# Altium PCB Power.PcbDoc
Units mil, origin at the board's own origin, x right, y up, seen from the top; angles counter-clockwise.
Board outline 6000 x 4000 mil, 2 copper layers (Top Layer, Bottom Layer); 67 components, 41 nets, 211 pads, 48 vias.
Unrouted connection lines stored in the file: 6.
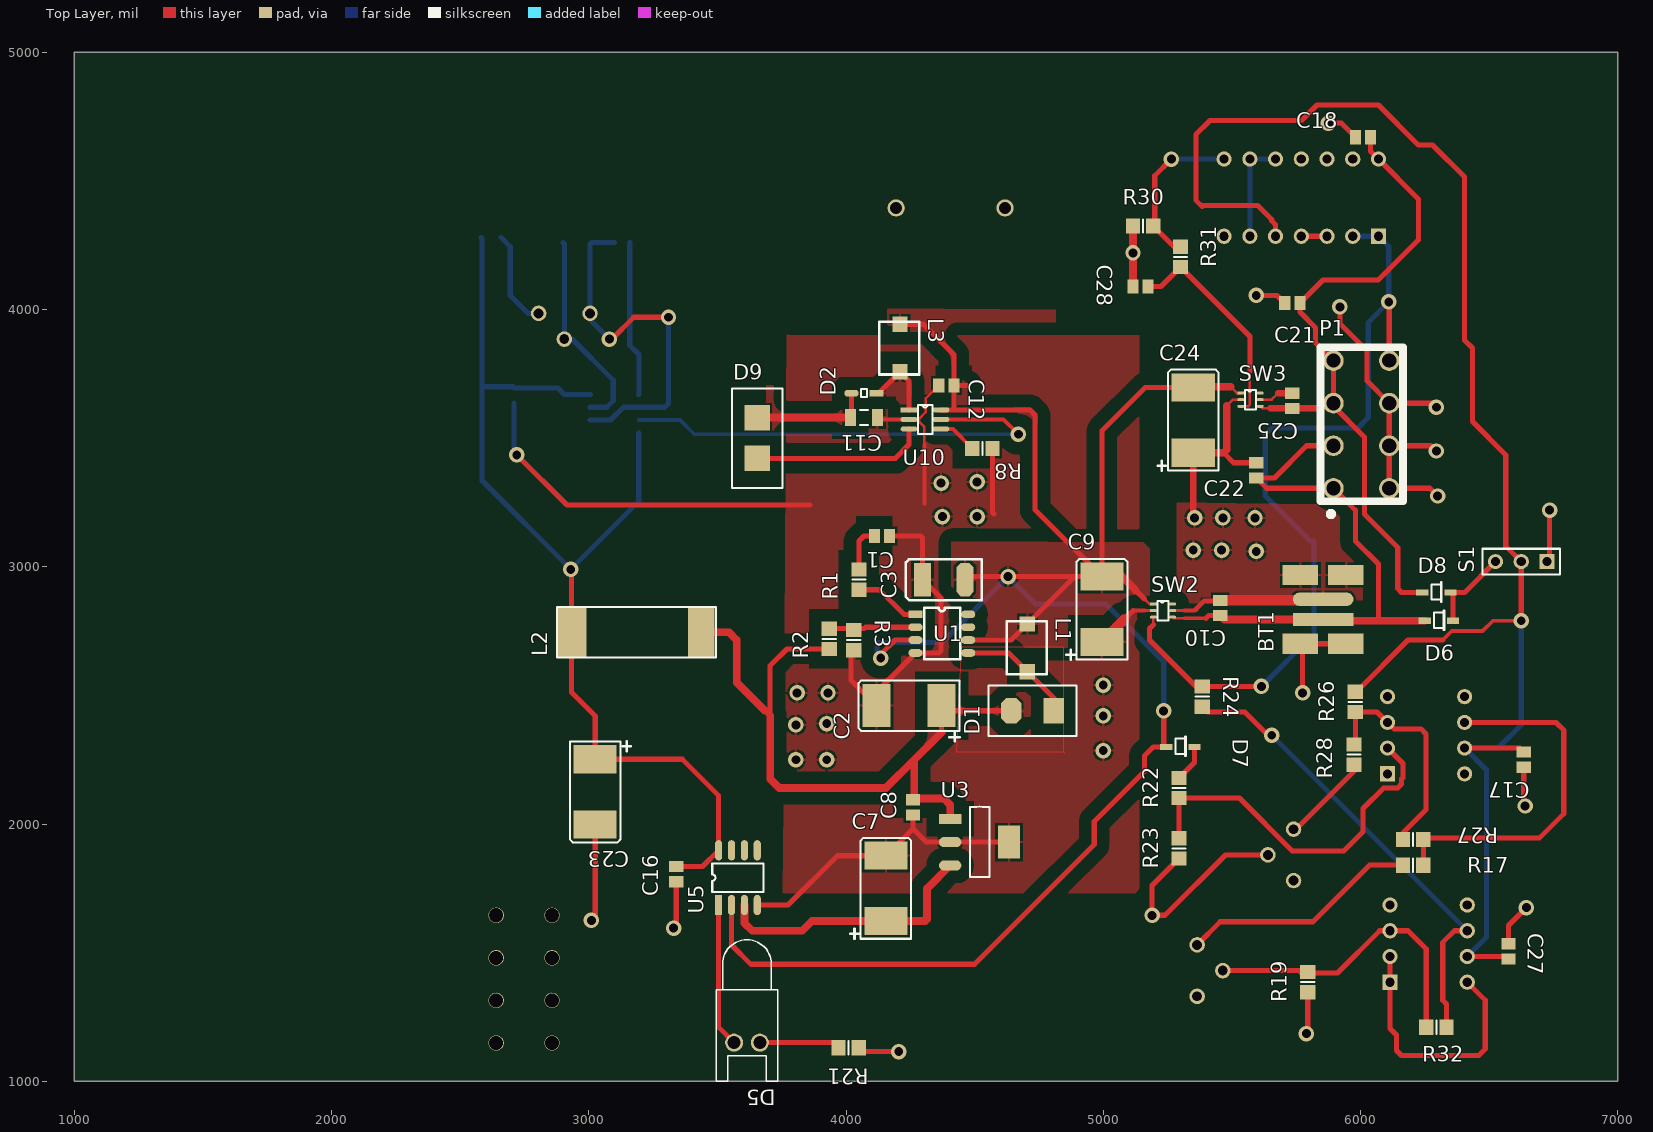
[diagram p0: Top Layer view]
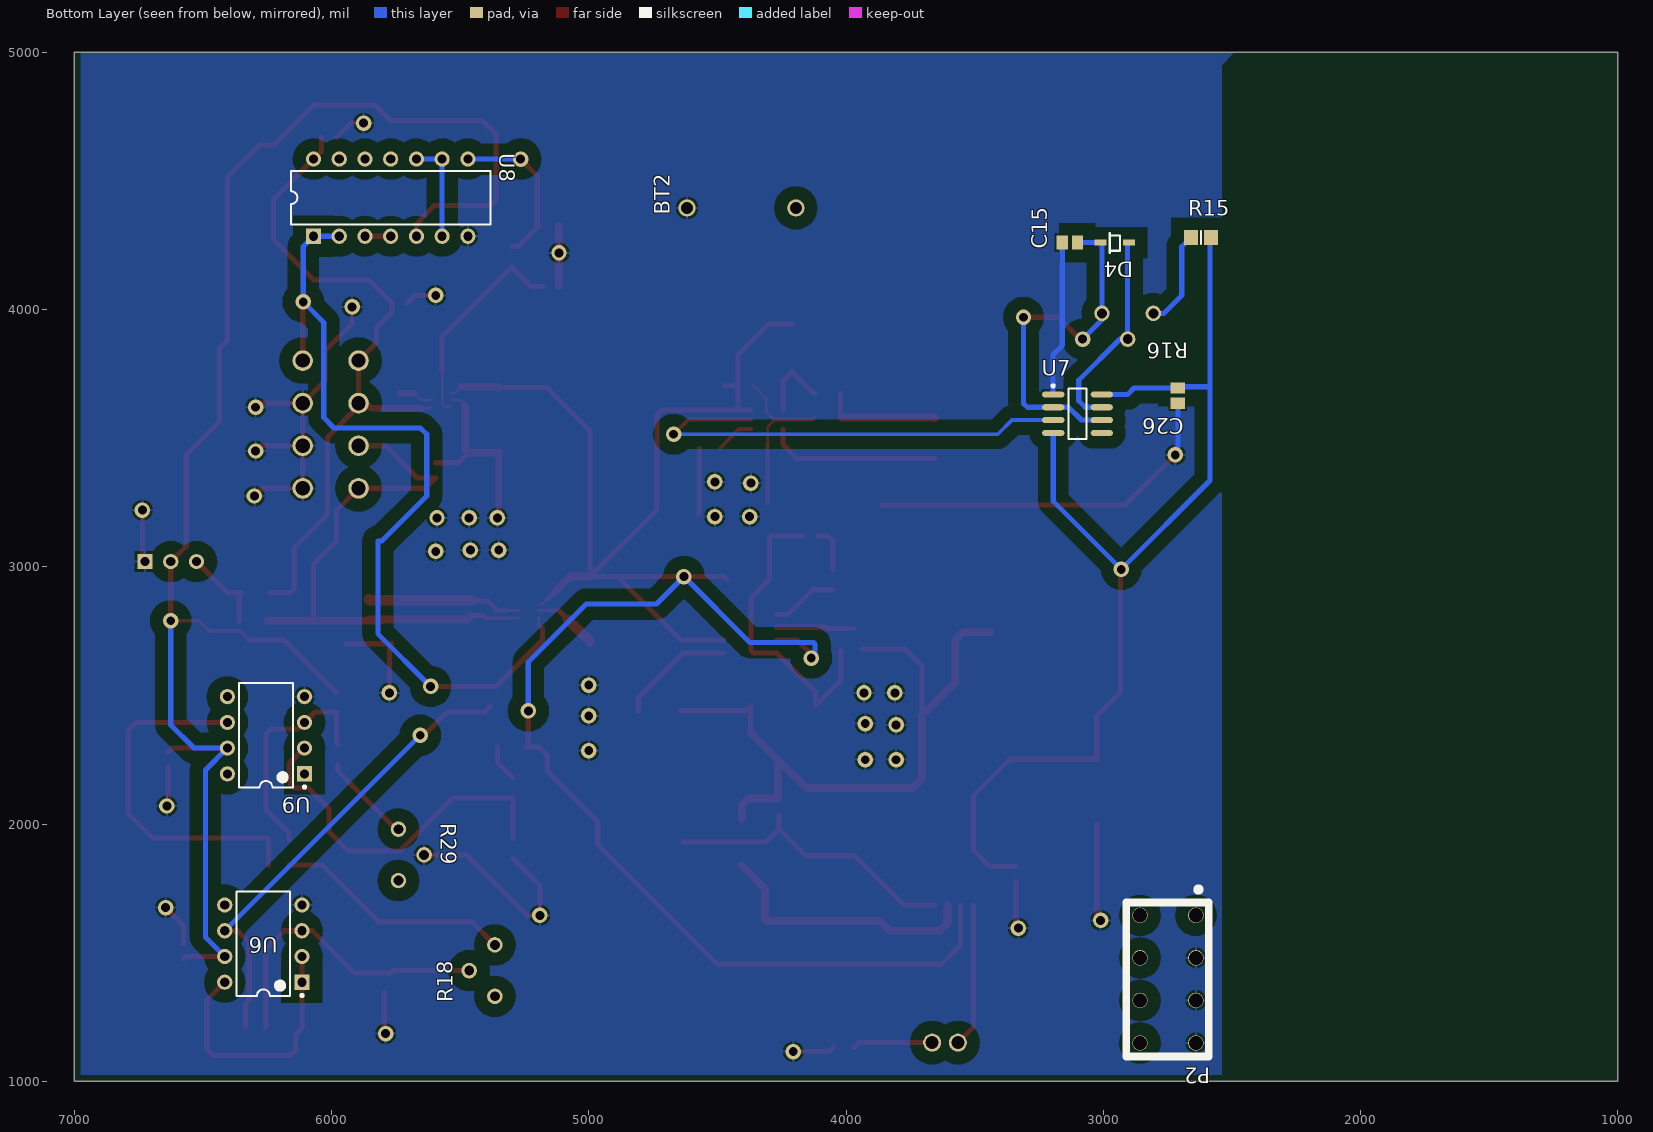
[diagram p1: Bottom Layer view, seen from below]

## Layer stack, top to bottom
Top Layer: signal copper 1.4
Dielectric: dielectric 12.6, FR-4, Dk 4.8
Bottom Layer: signal copper 1.4

## Board outline
1000,1000 7000,1000 7000,5000 1000,5000

## Design rules (kind name [scope] priority, off if disabled: settings)
Clearance Poly [InPoly] p1: gap=50
Clearance "Room Clearance" [TouchesRoom('Room','Room1','Room2')] p2: gap=10
Clearance [All] p3: gap=15
PolygonConnect [All] p1: connectstyle=Relief reliefconductorwidth=10 reliefentries=4 polygonreliefangle="90 Angle" airgapwidth=10
RoomDefinition Room2 [InComponentClass('Room Definition 3')] p1: confinementstyle=ConfineIn formatcopy=TRUE lockcomponents=FALSE outline 5507.22,3597.09 5507.22,3701.73 5637.58,3701.73 5637.58,3597.09
RoomDefinition Room [InComponentClass('Room Definition 1')] p2: confinementstyle=ConfineIn formatcopy=TRUE lockcomponents=FALSE outline 5167.22,2777.09 5167.22,2881.73 5297.58,2881.73 5297.58,2777.09
RoutingVias [All] p1: holewidth=28 width=50 viastyle="Through Hole" minholewidth=28 minwidth=50 maxholewidth=28 maxwidth=50
SilkscreenOverComponentPads [All] p1: minsilkscreentomaskgap=10
SolderMaskExpansion [All] p1: expansion=4
Width RoomWIdth [TouchesRoom('Room','Room1','Room2')] p1: maxlimit=10 minlimit=10 preferedwidth=10
Width [All] p2: maxlimit=40 minlimit=10 preferedwidth=20
27 further rules are at their usual default settings.

## Classes and differential pairs
component class Control_Sig: C15 C16 C17 C18 C26 C27 C28 D4 D5 D7 R15 R16 R17 R18 R19 R21 R22 R23 R26 R27 R28 R29 R30 R31 R32 U5 U6 U7 U8 U9
component class Power: BT1 BT2 C1 C2 C3 C7 C8 C9 C10 C11 C12 C21 C22 C23 C24 C25 D1 D2 D6 D8 D9 L1 L2 L3 P1 P2 R1 R2 R3 R8 R24 S1 SW2 SW3 U1 U3 U10

## Components (designator, comment, footprint, x,y, rotation, side; value= is the part's Value field where it differs from the comment)
BT1 "3.7V Li-Ion" "BATERY CONNECTOR" 5855,2795 r90 top
BT2 "Battery" "10MM COIN CELL" 4195,4395 r0 bottom
C1 "Cap" C0805 4140,3120 r180 top
C2 "220u" C2917 4245,2460 r180 top
C3 "47u" C2312 4380,2950 r180 top
C7 "220u" C2917 4155,1750 r90 top
C8 ".47u" C0805 4260,2065 r90 top
C9 "500u" C2917 4995,2835 r90 top
C10 "4.7uF" C0805 5455,2840 r270 top
C11 "1u" C1206 4070,3580 r180 top
C12 "4.7u" C0805 4390,3705 r0 top
C15 "22nF" C0805 3130,4260 r0 bottom
C16 "100nF" C0805 3340,1805 r270 top
C17 "100nF" C0805 6635,2250 r270 top
C18 "100nF" C0805 6010,4670 r0 top
C21 "100nf" C0805 5735,4025 r0 top
C22 "100nf" C0805 5595,3375 r270 top
C23 "1mF" C2917 3025,2125 r270 top
C24 "Cap" C2917 5350,3570 r90 top
C25 "4.7u" C0805 5735,3645 r270 top
C26 "100nF" C0805 2710,3665 r270 bottom
C27 "Cap" C0805 6575,1505 r270 top
C28 "4nF" C0805 5145,4090 r0 top
D1 "D Schottky" ShottkeyDiode 4725,2440 r180 top
D2 "D Schottky" ZHCSDiode 4070,3675 r180 top
D4 "Diode 1N4148" Diode 2955,4260 r0 bottom
D5 "LED0" LED-0 3615,1150 r180 top
D6 "Diode 1N4148" Diode 6305,2790 r0 top
D7 "Diode 1N4148" Diode 5300,2300 r0 top
D8 "Diode 1N4148" Diode 6295,2900 r0 top
D9 "D Zener" Zener 3655,3500 r90 top
L1 "4.7u" Inductor 4705,2685 r270 top
L2 "Inductor" "470U inductor" 3185,2745 r180 top
L3 "4.7u" Inductor 4210,3850 r270 top
P1 "Header 4X2" "Molex MiniFit Jr8"#1 5895,3305 r90 top
P2 "Header 4X2" "Molex MiniFit Jr8"#2 2640,1645 r270 bottom
R1 "47k" 6-0805_M 4050,2950 r90 top
R2 "309k" 6-0805_M 3935,2720 r90 top
R3 "100K" 6-0805_M 4030,2715 r270 top
R8 "1.27k" 6-0805_M 4530,3460 r180 top
R15 "Res1" 6-0805_M 2620,4280 r0 bottom
R16 "100K" POT 2805,3985 r0 bottom
R17 "Res1" 6-0805_M 6205,1840 r0 top
R18 "RPot" POT 5365,1330 r90 bottom
R19 "Res1" 6-0805_M 5795,1385 r90 top
R21 "Res1" 6-0805_M 4010,1130 r180 top
R22 "500K" 6-0805_M 5295,2140 r90 top
R23 "500K" 6-0805_M 5295,1905 r90 top
R24 "Res1" 6-0805_M 5385,2495 r270 top
R26 "500k" 6-0805_M 5980,2475 r90 top
R27 "Res1" 6-0805_M 6205,1940 r180 top
R28 "450k" 6-0805_M 5975,2270 r90 top
R29 "RPot" POT 5740,1980 r270 bottom
R30 "Res1" 6-0805_M 5155,4325 r0 top
R31 "Res1" 6-0805_M 5300,4205 r90 top
R32 "5M" 6-0805_M 6295,1210 r0 top
S1 "SW-SPDT" HDR1X3 6725,3020 r180 top
SW2 "SIP32431" "SOT6 - duplicate" 5195,2855 r0 top
SW3 "SIP32431" "SOT6 - duplicate" 5535,3675 r0 top
U1 "LTC1308ACS8" SOP8_LTC1308A 4270,2815 r0 top
U3 "LM3940" LDO 4405,2020 r0 top
U5 "MCP6022 OpAmp" SOP8_Opamp 3505,1685 r90 top
U6 "LT1635CN8" N8 6265,1535 r0 bottom
U7 "NE555D" D008_N 3100,3595 r180 bottom
U8 "SN74HC00N" N014 5770,4435 r180 bottom
U9 "LT1635CN8" N8 6255,2345 r0 bottom
U10 "LT1932" SOT6 4245,3610 r0 top

## Footprints (in the part's own frame and the unit in brackets; to place one, negate y for a bottom-side part, rotate by r counter-clockwise, add the part's x,y. Pads: shape width x height; smd on the part's side, far side on the other; paste and mask are expansions set on the pad)
6-0805_M [mm] "Chip Resistor, Body 2.0x1.2mm, IPC Low Density"
  rect 1.4x1.5 smd: 1(-1,0) 2(1,0)
  silkscreen extent 0,-0.65 0,0.65, body extent -1.07,-0.7 1.07,0.7, height 0.7
"10MM COIN CELL" [mm]
  rect 18.77x12.83 on Bottom Overlay: 0(5.37,0)
  round 1.7 hole 1.2: 1(0,0) 2(10.74,0)
"470U inductor" [mm]
  rect 2.6x5 smd: 1(-6.4,0)
  rect 3x5 smd: 2(6.4,0)
  silkscreen extent -7.85,-2.5 7.85,2.5
"BATERY CONNECTOR" [mm]
  rect 2x3.5 smd: 0(-2.4,-2.25) 0(-2.4,2.25) 0(4.4,-2.25) 0(4.4,2.25)
  rect 1.3x6 smd: 1(0,0)
  oval 1.3x6 smd: 2(2,0)
C0805 [mm] "Chip Capacitor, Body 2.0x1.3mm, IPC High Density"
  rect 1.1x1.4 smd: 1(-0.75,0) 2(0.75,0)
  body extent -1.1,-0.72 1.1,0.72, height 1.4
C1206 [mm] "Chip Capacitor, Body 3.2x1.6mm, IPC High Density"
  rect 1.1x1.7 smd: 1(-1.35,0) 2(1.35,0)
  silkscreen extent -0.4,-0.75 0.4,0.75, body extent -1.7,-0.9 1.7,0.9, height 1.3
C2312 [mil]
  oct 66.93x130 smd: 1(-82.5,0)
  rect 66.93x130 smd: 2(82.5,0)
  silkscreen extent -148,-79 148,80
C2917 [mm]
  rect 2.77x4.25 smd: 1(-3.22,0) 2(3.22,0)
  silkscreen extent -5,-2.5 4.98,3.5
D008_N [mm] "SOIC, 8-Leads, Body 4.9x3.9mm, Pitch 1.27mm, IPC Medium Density"
  oval 2.2x0.6 smd: 1(-2.4,1.905) 2(-2.4,0.635) 3(-2.4,-0.635) 4(-2.4,-1.905) 5(2.4,-1.905) 6(2.4,-0.635) 7(2.4,0.635) 8(2.4,1.905)
  silkscreen extent -2.53,-2.5 0.9,2.88, body extent -1.95,-2.45 1.95,2.45, height 1.75
Diode [mm]
  rect 1.2x0.6 smd: A(-1.4,0) K(1.4,0)
  silkscreen extent -0.5,-0.9 0.5,1
HDR1X3 [mm] "Connector; Header; 3 Position"
  rect 1.5x1.5 hole 0.9: 1(0,0)
  round 1.5 hole 0.9: 2(2.54,0) 3(5.08,0)
  silkscreen extent -1.27,-1.27 6.35,1.27
Inductor [mil]
  rect 60x60 smd: 1(-92.5,0) 2(92.5,0)
  silkscreen extent -103,-80 103,75
LDO [mm]
  rect 2.2x1 smd: 1(0,0)
  oval 2.2x1 smd: 2(0,-2.3) 3(0,-4.6)
  rect 2.2x3.25 smd: 4(5.8,-2.3)
  silkscreen extent 1.94,-5.75 3.87,1.2
LED-0 [mil] "LED; 2 Leads"
  round 70 hole 50: 1(50,0) 2(-50,0)
  silkscreen extent -120,-400 120,150
"Molex MiniFit Jr8"#1 [mil] "10 pin minifit jr (power cable)"
  round 80 hole 55 mask+4: 1(0,0) 2(0,-217) 3(165.5,0) 4(165.5,-217) 5(330.9,0) 6(330.9,-217) 7(496.3,0) 8(496.3,-217)
  silkscreen extent -110,-270 548,50
"Molex MiniFit Jr8"#2 [mil] "10 pin minifit jr (power cable)"
  round 60 hole 55: 1(0,0) 2(0,-217) 3(165.5,0) 4(165.5,-217) 5(330.9,0) 6(330.9,-217) 7(496.3,0) 8(496.3,-217)
  silkscreen extent -110,-270 548,50
N8 [mm] "DIP, 8-Leads, Row Spacing 7.62mm, Pitch 2.54mm, Body 9.78x6.48mm"
  rect 1.5x1.5 hole 0.9: 1(-3.81,3.81)
  round 1.5 hole 0.9: 2(-3.81,1.27) 3(-3.81,-1.27) 4(-3.81,-3.81) 5(3.81,-3.81) 6(3.81,-1.27) 7(3.81,1.27) 8(3.81,3.81)
  silkscreen extent -3.93,-5.15 2.65,5.23, body extent -3.6,-5.15 3.6,5.15, height 4.45
N014 [mm] "DIP; 14 Leads; Row Spacing 7.62 mm; Pitch 2.54 mm"
  rect 1.5x1.5 hole 0.9: 1(-7.62,-3.81)
  round 1.5 hole 0.9: 2(-5.08,-3.81) 3(-2.54,-3.81) 4(0,-3.81) 5(2.54,-3.81) 6(5.08,-3.81) 7(7.62,-3.81) 8(7.62,3.81) 9(5.08,3.81) 10(2.54,3.81) 11(0,3.81) 12(-2.54,3.81) 13(-5.08,3.81) 14(-7.62,3.81)
  silkscreen extent -9.85,-2.65 9.85,2.65
POT [mil]
  round 60 hole 38: 1(0,0) 2(100,100) 3(200,0)
ShottkeyDiode [mm]
  rect 2x2.5 smd: A(-2.1,0)
  oct 2x2.5 smd: K(2.1,0)
  silkscreen extent -4.35,-2.5 4.35,2.5
SOP8_LTC1308A [mil]
  rect 55x30 smd: 1(0,0)
  oval 55x30 smd: 2(0,-50) 3(0,-100) 4(0,-150) 5(205,-150) 6(205,-100) 7(205,-50) 8(205,0)
  silkscreen extent 34,-175 174,25
SOP8_Opamp [mm]
  rect 2x0.7 smd: 1(0,0)
  oval 2x0.7 smd: 2(0,-1.27) 3(0,-2.54) 4(0,-3.81) 5(5.4,-3.81) 6(5.4,-2.54) 7(5.4,-1.27) 8(5.4,0)
  silkscreen extent 1.3,-4.44 4.1,0.64
SOT6 [mm]
  rect 1.65x0.5 smd: 1(0,0)
  oval 1.65x0.5 smd: 2(0,-0.95) 3(0,-1.9) 4(3.15,-1.9) 5(3.15,-0.95) 6(3.15,0)
  silkscreen extent 0.9,-2.38 2.3,0.48
"SOT6 - duplicate" [mm]
  rect 0.7x0.3 smd: 1(0,0)
  oval 0.7x0.3 smd: 2(0,-0.65) 3(0,-1.3) 4(1.9,-1.3) 5(1.9,-0.65) 6(1.9,0)
  silkscreen extent 0.4,-1.62 1.5,0.33
Zener [mm]
  rect 2.5x2.5 smd: 1(-2,0) 2(2,0)
  silkscreen extent -4.9,-2.5 4.9,2.5
ZHCSDiode [mm]
  rect 1.4x0.65 smd: A(-1.225,0)
  oct 1.4x0.65 smd: K(1.225,0)
  silkscreen extent -0.3,-0.4 0.3,0.4

## Part data
BT1: library part Battery, "Multicell Battery"
BT2: "Multicell Battery"
C1 C24 C27: "Capacitor"
C2 C3: library part "Cap Pol1", "Polarized Capacitor (Radial)"
C7 C8 C9 C10 C11 C12 C15 C16 C17 C18 C21 C22 C23 C25 C26 C28: library part Cap, "Capacitor"
D1 D2: "Schottky Diode"
D4 D6 D7 D8: "High Conductance Fast Diode"
D5: "Typical INFRARED GaAs LED"
D9: "Zener Diode"
L1 L3: library part Inductor, "Inductor"
P1 P2: "Header, 4-Pin, Dual row"
R1 R2 R3 R8 R22 R23 R26 R28 R32: library part Res1, "Resistor"
R15: "=value"
R16: library part RPot, "Potentiometer"
R17 R19 R21 R24 R27 R30 R31: "Resistor"
R18 R29: "Potentiometer"
S1: "SPDT Subminiature Toggle Switch, Right Angle Mounting, Vertical Actuation"
U6 U9: "Micropower Rail-to-Rail Operational Amplifier and Reference"
U7: "Precision Timer"
U8: "Quadruple 2-Input Positive-NAND Gate"

## Via types
v1: diameter 60, hole 34.53, Top Layer to Bottom Layer, 48 vias

## Nets (pads, with @x,y where several pads share a name; then routed paths per layer and width w, separated by ;. In a path a pad name is that pad's centre, name@x,y a point inside that pad or via, vN(x,y) a via of type N, cw(c..) or ccw(c..) an arc to the next point about the centre after c; other vN are vias at no path point)
5V5: C16.1 C23.1 C26.1 L2.2 P2.4 R15.1 U5.8 U7.4 U7.8 | length 4227
  Top Layer w20: v1(2930,2990) 2933.03,2986.97 L2.2 2933.03,2511.97 3025,2420 C23.1 3363.23,2251.77 3505,2110 U5.8 3441.93,1834.53 C16.1
  Bottom Layer w20: R15.1 2585,4275.63 2585,3700 ; U7.8 2905,3670 2880.47,3694.53 C26.1 2704.53,3700 2585,3700 ; U7.4 3194.49,3254.49 v1(2930,2990) 2585,3335 2585,3700
"CHARGE CONNECT": P1.8 R24.1 SW2.3 U8.1 U8.2 | length 3267.8
  Top Layer w10: 5195,2775 SW2.3
  Top Layer w20: 5195,2775 5180,2760 5180,2715 5360.63,2534.37 R24.1 5385.63,2535 v1(5615,2535) ; P1.8 v1@6112,4030
  Bottom Layer w20: v1(5615,2535) 5820,2740 5820,3100 5805,3100 5630,3275 5630,3515 5655,3540 5990,3540 6030,3580 6030,3950 v1(6110,4030) 6110,4245 U8.1 U8.2
GND: BT1.0 BT1.2 BT2.2 C1.1 C2.2 C3.2 C7.2 C8.1 C9.1 C10.1 C11.1 C12.1 C15.2 C16.2 C17.2 C18.1 C21.1 C22.1 C23.2 C24.1 C25.1 C26.2 C27.1 C28.1 P1.2 P1.4 P1.6 P2.3 P2.5 P2.7 R3.2 R8.1 R19.1 R21.1 R23.1 R29.2 R30.1 S1.1 SW2.2 SW2.5 SW3.2 SW3.5 U1.4 U3.2 U3.4 U5.4 U6.4 U7.1 U8.7 U9.4 U10.2 | length 11557.4
  Top Layer w10: U10.2@4275.98,3572.6 4305,3543.57 4305,3475 ; 4281.74,3572.6 4310,3600.86 4310,3654.53 C12.1 ; C28.1 C28.1@5115.63,4090.16 ; 5160,2830 5194.41,2830 SW2.2 ; SW2.5 5270.39,2830 5315,2830 ; 5480,3625 5504.41,3649.41 SW3.2 ; SW3.5 5610.39,3650 5655,3650 5679.53,3674.53
  Top Layer w15: C11.1 4130.55,3572.6 U10.2 4275.98,3572.6 4281.74,3572.6 ; 4305,3245 4305,3475 ; 5116.77,2830 5160,2830 ; 5315,2830 5355,2830
  Top Layer w20: v1(2720,3435) 2915,3240 3860,3240 ; v1(3010,1625) 3025,1640 C23.2 ; v1(3330,1595) 3340,1605 C16.2 ; U5.4 3775,1685 3966.77,1876.77 C7.2 4260,1981.77 ; R3.2@4020,2675 4020,2558.23 C2.2 4118.23,2513.23 U1.4 4360,2665 4370,2675 4370,2877.5 C3.2 4297.5,3112.5 4290,3120 C1.1 ; R21.1 4064.37,1115 v1(4205,1115) ; C8.1 4260,1981.77 ; R8.1 4569.37,3210.63 4575,3205 ; U3.4 U3.2 4404.45,1930 4311.77,1930 4260,1981.77 ; 5081.77,2795 5116.77,2830 ; R23.1 5190,1760.63 v1(5190,1645) 5240,1645 5475,1880 R29.2 ; 5360,2835 5392.5,2867.5 5452.97,2867.5 C10.1 ; 5468.23,3443.23 5506.93,3404.53 C22.1 ; v1(5595,4055) 5675.47,4055 C21.1 ; v1(5775,2510) 5775,2691.93 5766.42,2700.51 BT1.0@5943.58,2700.51 ; v1(5790,1185) 5795,1190 R19.1 ; v1(5875,4725) 5925.47,4725 C18.1 ; v1(5920,4010) 5920,3945 6025,3840 6025,3722.9 P1.6 ; v1(6295,3450) 6274.5,3470.5 P1.4 ; v1(6295,3620) 6279.1,3635.9 P1.6 ; v1(6300,3275) 6270,3305 P1.2 P1.4 ; C27.1 6575,1605 v1(6645,1675) ; C17.2 6635,2075 v1(6640,2070) ; S1.1 6735,3030 v1(6735,3220) ; P1.4 P1.6
  Top Layer w25: C24.1 5350,3195 v1(5355,3190) ; 5679.53,3674.53 C25.1
  Top Layer w30: C28.1@5115.63,4090.16 R30.1 ; C24.1 5468.23,3443.23 5480,3455 5480,3625
  Top Layer w40: C9.1 5081.77,2795 ; C10.1 5850.79,2869.53 BT1.2
  Bottom Layer w20: C26.2 2710,3445 v1(2720,3435) ; C15.2 3159.53,3860.47 3195,3825 3195,3670.51 U7.1
  other v1: 3805,2250 3925,2250 5000,2285 3805,2385 3925,2390 5000,2420 3810,2510 3930,2510 5000,2540 5595,3060 5350,3065 5460,3065 5465,3190 5590,3190 4375,3195 4510,3195 4370,3325 4510,3330 5115.63,4220
LBI: U1.7
LBO: U1.8
LDO3: C7.1 P2.8 U3.3 U5.3 | length 1057.2
  Top Layer w20: 4308.23,1623.23 4315,1630
  Top Layer w30: U5.3 3605,1615 3635,1585 3830,1585 3868.23,1623.23 C7.1 4308.23,1623.23 ; 4315,1630 4315,1748.9 U3.3
LEDA: C11.2 D2.K D9.2 P2.2 | length 459.4
  Top Layer w20: C11.2 4021.77,3584.92 D2.K
  Top Layer w30: D9.2 3656.26,3580 C11.2
LEDK: D9.1 P2.1 U10.3 | length 672.5
  Top Layer w20: D9.1 4191.26,3421.26 4245,3475 U10.3
NetBT2_1: BT2.1 P2.6
NetC1_2: C1.2 R1.2 | length 179.4
  Top Layer w20: R1.2 4050,3100 4070,3120 C1.2
NetC2_1: C2.1 C8.2 D1.K L2.1 R2.1 U3.1 | length 2724.7
  Top Layer w20: R2.1 3770.63,2680.63 3705,2615 3705,2440 ; 4371.77,2356.77 C2.1 4391.77,2440 D1.K ; 3705,2440 3705,2420 3685,2440 3705,2440
  Top Layer w30: L2.1 3545,2745 3575,2715 3575,2550 3685,2440 ; 3705,2420 3705,2175 3740,2140 4155,2140 4265,2250 ; 4371.77,2356.77 4265,2250 ; U3.1 4405,2074.06 4379.53,2099.53 4265,2099.53 4265,2250
NetC15_1: C15.1 D4.K R16.3 U7.2 U7.6 | length 1430.2
  Top Layer w20: v1(3080,3885) 3090,3885 3175,3970 v1(3310,3970)
  Bottom Layer w20: U7.6 3085,3570 3135,3620 U7.2 3295,3620 3310,3635 v1(3310,3970) ; v1(3080,3885) 3005,3960 R16.3 3005,4254.88 D4.K C15.1
NetD2_1: D2.A L3.2 U10.1 | length 287.9
  Top Layer w20: D2.A 4127.5,3675 L3.2 4245,3722.5 U10.1
NetD4_A: D4.A R16.2 U7.7 | length 813.2
  Bottom Layer w20: D4.A 2905,4254.88 R16.2 2935,3885 3095,3725 3095,3645 3070,3620 U7.7
NetD5_1: D5.1 U5.1 | length 559.9
  Top Layer w20: U5.1 3505,1210 D5.1
NetD5_2: D5.2 R21.2 | length 313.9
  Top Layer w20: D5.2 3950.63,1150 R21.2
NetD6_K: D6.K D8.K S1.3 | length 338.7
  Top Layer w20: D6.K 6360.12,2890 D8.K 6405,2900 S1.3
NetD7_K: D7.K R22.2 | length 145.5
  Top Layer w20: R22.2 5355.12,2239.49 D7.K
NetR1_1: R1.1 U1.1 | length 259.6
  Top Layer w20: R1.1 4129.37,2910.63 4225,2815 U1.1
NetR2_2: R2.2 R3.1 U1.2 | length 302.3
  Top Layer w20: 3970,2759.37 4070,2759.37 4075.63,2765 U1.2
NetR8_2: R8.2 U10.4 | length 152.8
  Top Layer w15: U10.4 4415.43,3535.2 R8.2
NetR15_2: R15.2 R16.1 | length 378.8
  Bottom Layer w20: R15.2 2695,4244.37 2695,4055 2765,3985 R16.1
NetR17_1: R17.1 R18.3 | length 929
  Top Layer w20: R18.3 5455,1620 5815,1620 6035,1840 R17.1
NetR17_2: R17.2 R27.1 U9.6 | length 1409.5
  Top Layer w20: R17.2 R27.1 6249.37,1945 6695,1945 6790,2040 6790,2365 6760,2395 U9.6
NetR18_2: R18.2 R19.2 R32.1 U6.3 | length 1196.2
  Top Layer w20: R18.2 5760.63,1430 5770,1420.63 5910.63,1420.63 6075,1585 U6.3 6185,1585 6255.63,1514.37 R32.1
NetR22_1: R22.1 R23.2 U9.2 | length 1433.4
  Top Layer w20: R23.2 R22.1 5529.37,2100.63 5735,1895 5935,1895 6010,1970 6010,2060 6090.47,2140.47 6144.88,2140.47 6159.53,2155.12 6159.53,2174.53 6165,2180 6165,2235 U9.2
NetR26_1: R26.1 R27.2 R28.2 U9.3 | length 885.8
  Top Layer w20: R28.2 5980,2314.37 R26.1 6064.37,2435.63 U9.3 6130,2370 6235,2370 6255,2350 6255,2055 6165.63,1965.63 R27.2
NetR28_1: R28.1 R29.1 | length 358
  Top Layer w20: R29.1@5740,1970 5975,2205 R28.1
NetR30_2: R30.2 R31.2 U8.8 | length 633.3
  Top Layer w20: v1(5265,4585) 5200,4520 5200,4330.63 R30.2 5275,4244.37 R31.2
  Bottom Layer w20: v1(5265,4585) U8.8
NetU6_1: U6.1 U6.2 U6.8 | length 1028
  Top Layer w20: U6.2 U6.1 6115,1205 6140,1180 6140,1120 6160,1100 6460,1100 6485,1125 6485,1315 U6.8
NetU8_3: U8.3 U8.4 | length 100
  Top Layer w20: U8.4 U8.3
NetU8_6: U8.6 U8.9 U8.10 | length 400
  Bottom Layer w20: U8.6 U8.9 U8.10
ON/OFF: R24.2 R32.2 U6.6 | length 1845.2
  Top Layer w20: R24.2 5405.63,2435 5550,2435 5640,2345 v1(5655,2345) ; R32.2 6334.37,1300.63 6320,1315 6320,1540 6365,1585 U6.6
  Bottom Layer w20: v1@5650,2345 v1(5655,2345) U6.6
PWM: U7.3 U10.5 | length 1823.1
  Top Layer w15: U10.5 4612.4,3572.6 v1(4670,3515)
  Bottom Layer w15: U7.3 3355,3570 3410,3515 v1(4670,3515)
SW: D1.A L1.2 U1.5 | length 455.1
  Top Layer w20: U1.5 4632.5,2665 L1.2 4807.68,2489.82 D1.A
VBAT: BT1.1 C10.2 C22.2 D6.A P1.1 P1.3 SW2.4 | length 2298.2
  Top Layer w10: SW2.4 5273.62,2800 5315,2800
  Top Layer w15: 5315,2800 5400,2800
  Top Layer w20: 5400,2800 5410.47,2810.47 C10.2 ; P1.3 5790.5,3470.5 5665.47,3345.47 C22.2 5635.47,3305 P1.1 5980,3220 5980,3100.5 6070,3010.5 6070,2790
  Top Layer w30: C10.2 5470.47,2795 BT1.1 ; BT1.1@5805.2,2790 6070,2790 D6.A@6249.8,2790
VBATCHECK: C17.1 C27.2 R26.2 S1.2 U6.7 U8.5 U9.7 | length 6379.2
  Top Layer w15: 6320,2715 6355,2750 6475,2750 6515,2790 v1(6625,2790)
  Top Layer w20: U8.5 5670,4330 5655,4345 5655,4350 5600,4405 5390,4405 5385,4400 5360,4425 5360,4680 5415,4735 5770.9,4735 5830.9,4795 6070,4795 6225,4640 6280,4640 6405,4515 6405,3880 6435,3850 6435,3565 6565,3435 6565,3080 S1.2 v1(6625,2790) ; R26.2 5984.37,2514.37 6185,2715 6320,2715 ; U9.7 6619.53,2295 C17.1 ; U6.7 6565.47,1485 C27.2
  Bottom Layer w20: U6.7 6490,1560 6490,2210 U9.7 6535,2295 6625,2385 v1(6625,2790)
VCC: 
VIN: C3.1 C9.2 C12.2 C24.2 D7.A L1.1 L3.1 SW2.1 SW3.1 U1.3 U1.6 U5.2 U10.6 | length 8362.8
  Top Layer w10: 5160,2875 5180,2855 SW2.1 ; 5495,3700 5520,3675 SW3.1
  Top Layer w20: U5.2 3555,1530 3630,1455 4500,1455 4965,1920 4965,2010 5160,2205 5160,2265 5195,2300 D7.A 5235,2309.88 v1(5235,2440) ; v1(4135,2645) 4135,2660 4190,2715 U1.3 ; L3.1 4301.56,3942.5 4419.53,3824.53 C12.2 ; U10.6 4420,3610 ; C3.1 4474.27,2961.77 v1(4630,2961.77) 4889.27,2961.77 ; 4470,3705 C12.2 ; U1.6 4642.5,2715 L1.1 4889.27,2961.77 ; 5125,2910 5160,2875 ; C24.2 5163.23,3696.77 4995,3528.54 C9.2 ; C12.2 4419.53,3610.47 4420,3610 ; 4420,3610 4715,3610 4735,3590 4735,3221.77 C9.2 ; 4889.27,2961.77 C9.2
  Top Layer w30: C9.2 5073.23,2961.77 5125,2910 ; C24.2 5353.23,3700 5495,3700
  Bottom Layer w20: v1(4135,2645) 4120,2660 4120,2700 4125,2705 4373.23,2705 v1(4630,2961.77) 4736.77,2855 5010,2855 5235,2630 v1(5235,2440)
VWALL: C18.2 C21.2 C25.2 D8.A P1.5 P1.7 SW3.4 U8.14 | length 2714.5
  Top Layer w10: SW3.4 5618.15,3615.47 5650,3615.47
  Top Layer w20: C18.2 6039.53,4615.47 U8.14 6225,4430 6225,4270.47 6160,4205.47 6069.53,4115 5855,4115 5854.76,4115.24 C21.2 5764.53,3990.47 5825.41,3929.59 5825.41,3870.89 P1.7 P1.5 5895,3625 6015,3505 6015,3205 6145,3075 6145,2915 6160,2900 D8.A
  Top Layer w25: 5650,3615.47 5845.47,3615.47 5865.9,3635.9 P1.5
  Bottom Layer w20: U8.14 U8.14@6080,4585
WALLON: C28.2 R31.1 SW3.3 | length 841.8
  Top Layer w10: SW3.3 5563.82,3623.82 5570,3630 5570,3760
  Top Layer w20: C28.2 5224.37,4090 R31.1 5570,3895.63 5570,3760
pads on no net: BT2.0 R18.1 R29.3 SW2.6 SW3.6 U5.5 U5.6 U5.7 U6.5 U7.5 U8.11 U8.12 U8.13 U9.1 U9.5 U9.8

## Polygon pours and split planes (outlines as drawn)
GND on Bottom Layer "GRND" (solid, remove dead copper, pour order 10): 2490,5000 2540,4950 2540,1025 6975,1025 6995,1005 6975,1025 6975,5000
GND on Top Layer "Grnd" (solid, pour order 2): 5285,3250 5285,2840 6050,2840 6055,2835 6035,2855 6035,3240
VIN on Top Layer "Vin" (solid, pour order 4): 4410,3100 4410,2690 4415,2685 5180,2685 5180,3070 5155,3095
GND on Top Layer "grnd" (solid, pour order 6): 3770.39,3910 3778.08,3900.84 5140,3900.84 5140,1748.32 5132.31,1739.16 5124.61,1730 3755,1730
NetC2_1 on Top Layer "NetC2" (solid, pour order 8): 4305,2560.82 4305,2289.18 4310,2285 4720,2285 4720,2565
SW on Top Layer "SW" (solid, pour order 10): 4450,2690 4845,2690 4845,2279.72 4850,2275 4845,2279.72 4430,2279.72
VIN on Top Layer "Vin" (solid, pour order 14): 4160,4005 4160,3560 4200,3520 4815,3520 4815,4000
NetD2_1 on Top Layer "D1" (solid, pour order 16): 4095,3835 4305,3835 4305,3585 4310,3580 4300,3590 4095,3590
LEDA on Top Layer "LEDA" (solid, pour order 18): 3690,3705 3690,3505 3701.67,3508.03 4075,3508.03 4075,3701.97 4063.33,3705